# Altium PCB stm32c8t6.PcbDoc
Units mil, origin at the board's own origin, x right, y up, seen from the top; angles counter-clockwise.
Board outline 2539.23 x 2039 mil, 2 copper layers (Top Layer, Bottom Layer); 30 components, 48 nets, 151 pads, 26 vias.
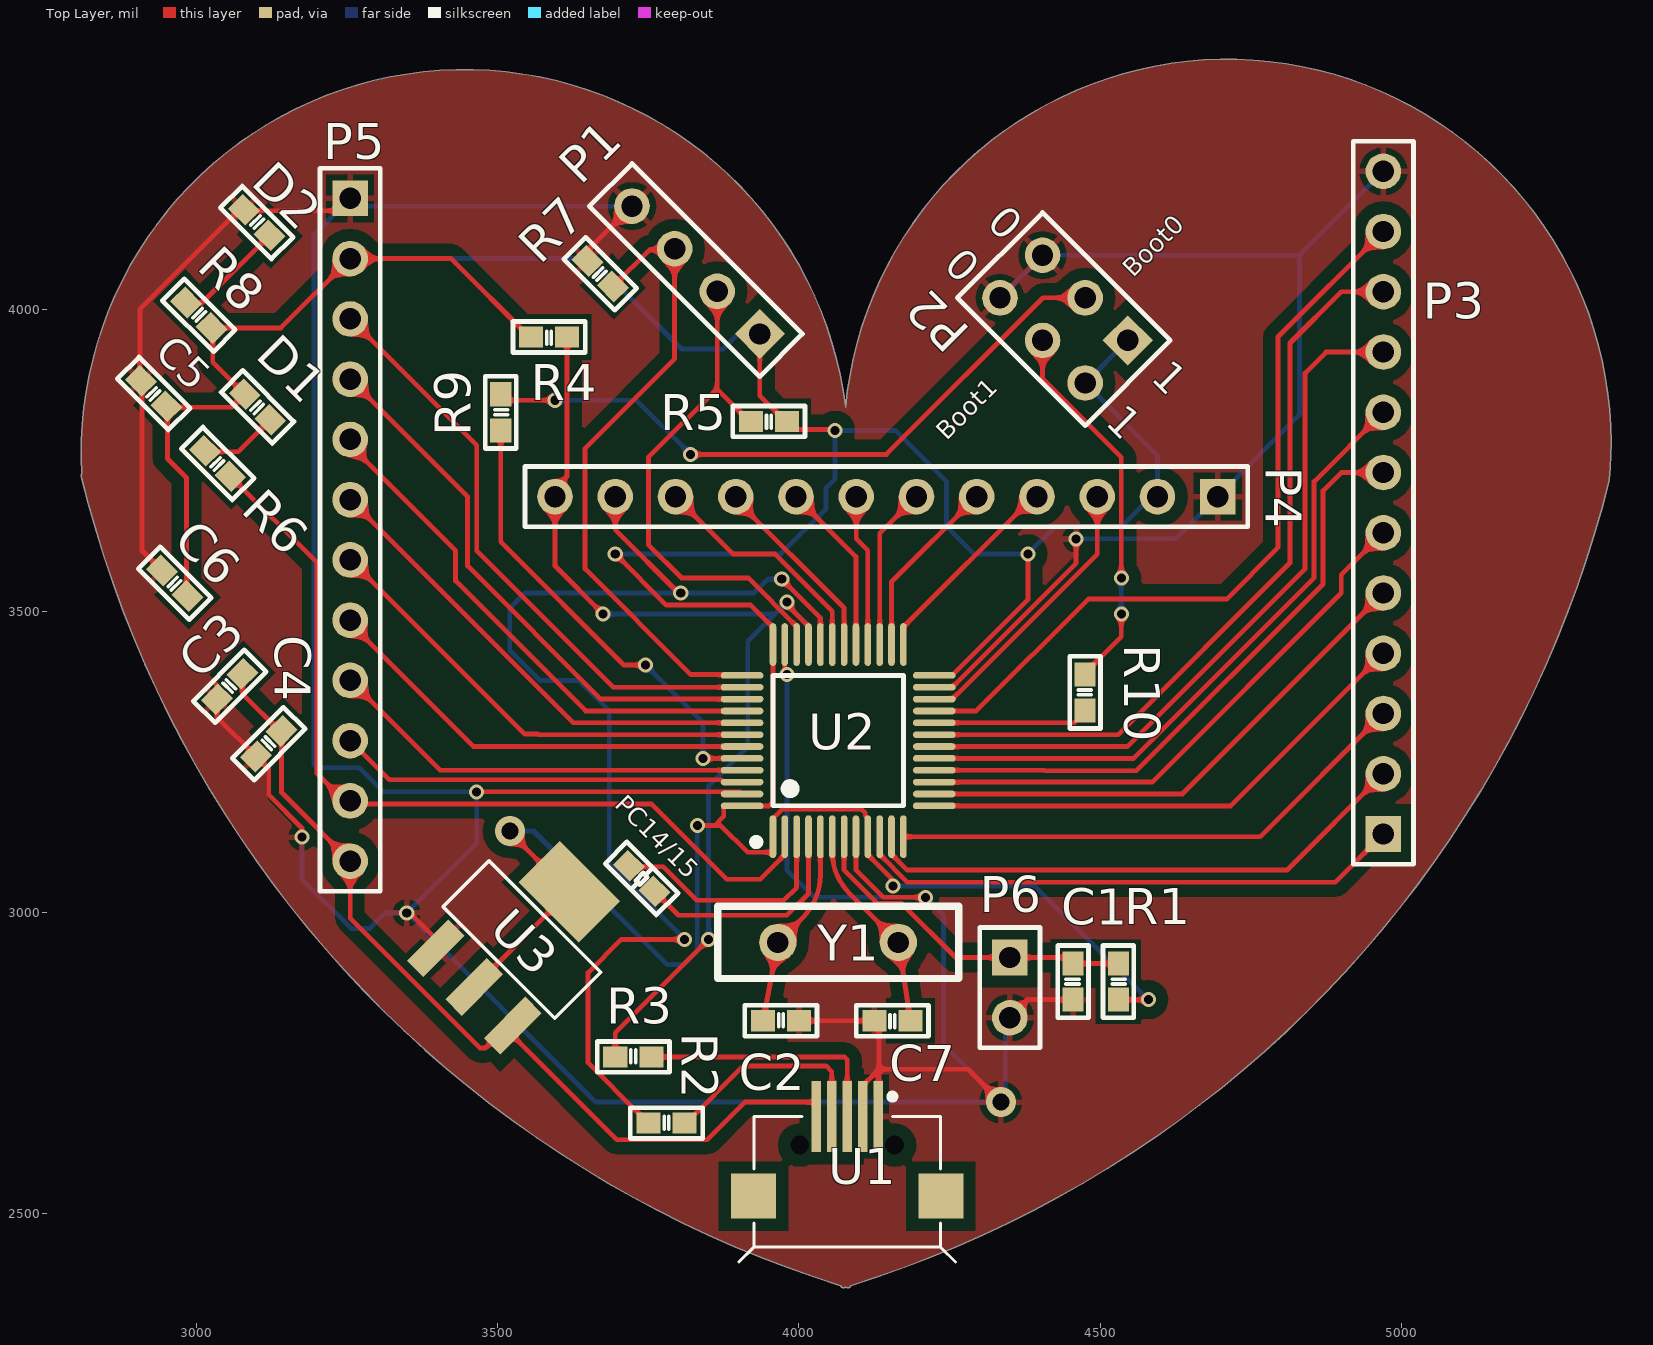
[diagram p0: Top Layer view]
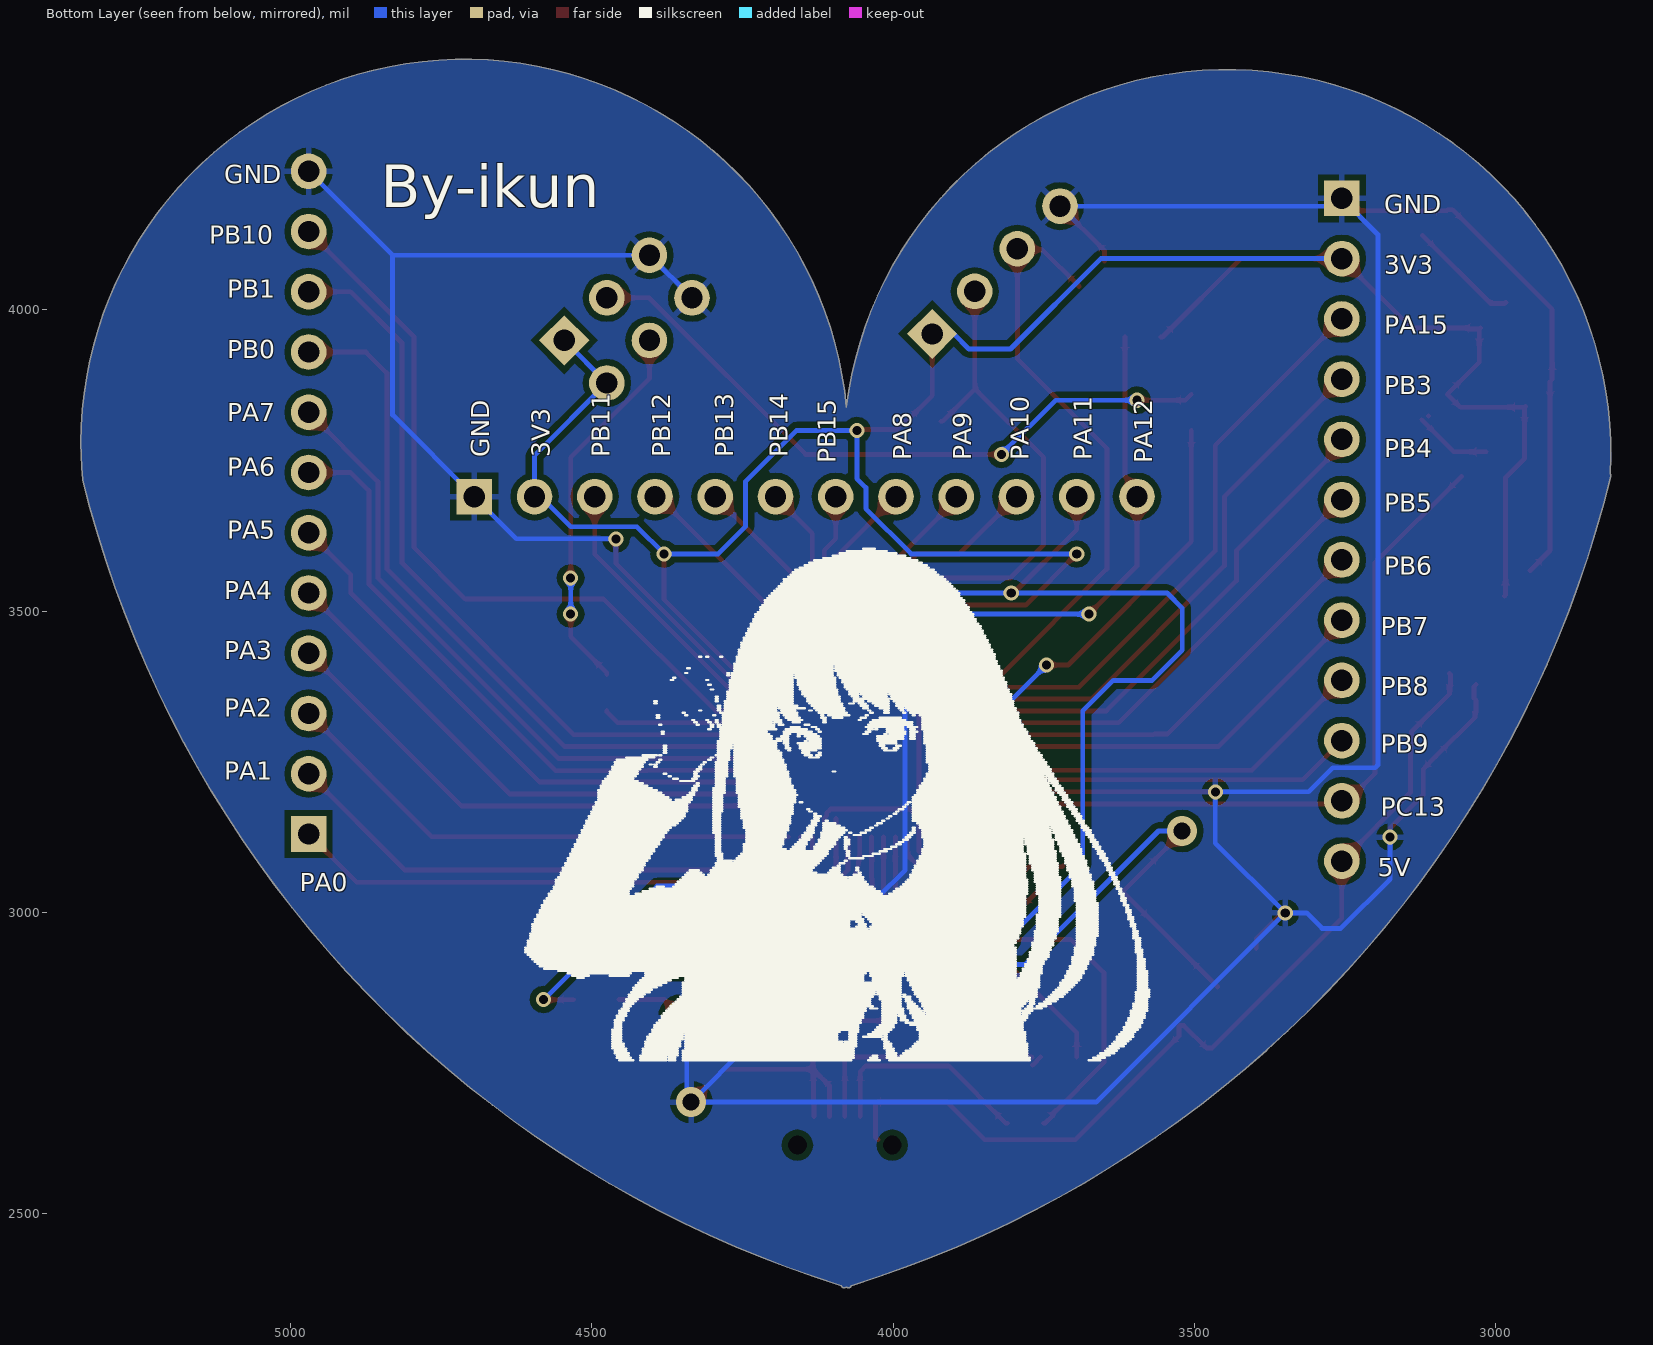
[diagram p1: Bottom Layer view, seen from below]

## Layer stack, top to bottom
Top Solder: solder mask 0.4, Solder Resist, Dk 3.5
Top Layer: signal copper 1.4
Dielectric 1: dielectric 12.6, FR-4, Dk 4.8
Bottom Layer: signal copper 1.4
Bottom Solder: solder mask 0.4, Solder Resist, Dk 3.5

## Board outline
4069.09,2380.34 ccw(c4073.86,2381.87) 4075.33,2377.07 ccw(c3528.81,4166) 4077.5,2377.74 ccw(c4626.19,4166) 4079.67,2377.07 ccw(c4081.14,2381.87) 4085.91,2380.34 ccw(c3528.81,4166) 5344.73,3717.24 ccw(c5339.87,3718.48) 5344.86,3717.99 ccw(c4711.2,3779.35) 5347.82,3779.35 ccw(c4711.2,3779.35) 4077.3,3838.09 ccw(c3445.22,3762.16) 2809.54,3727.65 ccw(c2813.6,3724.71) 2808.73,3723.53 ccw(c4626.19,4166)
cut-out: 0,0 10,0 10,10 0,10

## Design rules (kind name [scope] priority, off if disabled: settings)
Clearance Clearance_test [(InNamedPolygon('Top Layer-No Net1'))] p1: gap=10 ignorepadtopadclearanceinfootprint=TRUE
Clearance [InNamedPolygon('Top Layer-No Net')] p2: gap=20 ignorepadtopadclearanceinfootprint=FALSE
Clearance Clearance_U1_U2 [(InComponent('U1') AND InComponent('U2'))] p3: gap=0 ignorepadtopadclearanceinfootprint=TRUE
PolygonConnect [All] p1: connectstyle=Relief reliefconductorwidth=10 reliefentries=4 polygonreliefangle="90 Angle" airgapwidth=10
RoutingVias [All] p1: holewidth=15 width=25 viastyle="Through Hole" minholewidth=15 minwidth=20 maxholewidth=20 maxwidth=25
SolderMaskExpansion [All] p1: expansion=4 istentingtop=FALSE
Width [All] p1: maxlimit=30 minlimit=5 preferedwidth=8 minimp=50.000000 maximp=50.000000 favimp=50.000000
30 further rules are at their usual default settings.

## Components (designator, comment, footprint, x,y, rotation, side; value= is the part's Value field where it differs from the comment)
C1 "Cap" C0603 4455,2885 r270 top
C2 "Cap" C0603 3970.08,2820 r180 top
C3 "Cap" C0603 3055,3375 r225 top
C4 "Cap" C0603 3120,3280 r225 top
C5 "Cap" C0603 2928.84,3861.16 r315 top
C6 "Cap" C0603 2963.84,3546.16 r315 top
C7 "Cap" C0603 4155,2820 r0 top
D1 "LED0" C0603 3101.16,3838.84 r315 top
D2 "LED0" C0603 3100,4145 r135 top
P1 "Header 4" HDR1X4 3935,3960 r135 top
P2 "Header 3*2" HDR2X3 4545.71,3949.29 r135 top
P3 "Header 12" HDR1X12 4970,3130 r90 top
P4 "Header 12" HDR1X12 4695,3690 r180 top
P5 "Header 12" HDR1X12 3255,4185 r270 top
P6 "Header 2" HDR1X2 4350,2925 r270 top
PC14/15 "Res1" R0603 3738.84,3056.16 r315 top
R1 "Res1" C0603 4530,2884.92 r90 top
R2 "20R,0603" C0603 3780.08,2650 r180 top
R3 "20R,0603" C0603 3724.92,2760 r180 top
R4 "1.5k,0603" C0603 3585.08,3955 r0 top
R5 "Res1" C0603 3950,3815 r0 top
R6 "Res1" C0603 3035,3745 r315 top
R7 "Res1" C0603 3670,4060 r315 top
R8 "Res1" C0603 3003.84,3991.16 r135 top
R9 "Res1" C0603 3505,3830 r90 top
R10 "Res1" C0603 4475,3365.08 r270 top
U1 "USB-mrico" Micro_USB 4080,2595 r0 top
U2 "STM32F103C8T6" LC-LQFP-48_7x7x05P 4065,3285 r0 top
U3 "AMS1117-2.5" SOT-223-4_L6.5-W3.5-P2.30-LS7.0-BR 3540,2955 r225 top
Y1 "8M" XTAL1 3965,2950 r0 top

## Footprints (in the part's own frame and the unit in brackets; to place one, negate y for a bottom-side part, rotate by r counter-clockwise, add the part's x,y. Pads: shape width x height; smd on the part's side, far side on the other; paste and mask are expansions set on the pad)
C0603 [mil]
  rect 40x35 smd: 1(-29.92,0) 2(29.92,0)
  silkscreen extent -60,-26 60,26
HDR1X2 [mm] "Connector; Header; 2 Position"
  rect 1.5x1.5 hole 0.9: 1(0,0)
  round 1.5 hole 0.9: 2(2.54,0)
  silkscreen extent -1.27,-1.27 3.81,1.27
HDR1X4 [mm] "Connector; Header; 4 Position"
  rect 1.5x1.5 hole 0.9: 1(0,0)
  round 1.5 hole 0.9: 2(2.54,0) 3(5.08,0) 4(7.62,0)
  silkscreen extent -1.27,-1.27 8.89,1.27
HDR1X12 [mm] "Connector; Header; 12 Position"
  rect 1.5x1.5 hole 0.9: 1(0,0)
  round 1.5 hole 0.9: 2(2.54,0) 3(5.08,0) 4(7.62,0) 5(10.16,0) 6(12.7,0) 7(15.24,0) 8(17.78,0) 9(20.32,0) 10(22.86,0) 11(25.4,0) 12(27.94,0)
  silkscreen extent -1.27,-1.27 29.21,1.27
HDR2X3 [mm] "Connector; Header; 3x2 Position"
  rect 1.5x1.5 hole 0.9: 1(0,0)
  round 1.5 hole 0.9: 2(0,2.54) 3(2.54,0) 4(2.54,2.54) 5(5.08,0) 6(5.08,2.54)
  silkscreen extent -1.27,-1.27 6.35,3.81
LC-LQFP-48_7x7x05P [mm]
  oval 0.28x1.8 smd mask+0.051: 1(-2.75,-4.05) 2(-2.25,-4.05) 3(-1.75,-4.05) 4(-1.25,-4.05) 5(-0.75,-4.05) 6(-0.25,-4.05) 7(0.25,-4.05) 8(0.75,-4.05) 9(1.25,-4.05) 10(1.75,-4.05) 11(2.25,-4.05) 12(2.75,-4.05) 25(2.75,4.05) 26(2.25,4.05) 27(1.75,4.05) 28(1.25,4.05) 29(0.75,4.05) 30(0.25,4.05) 31(-0.25,4.05) 32(-0.75,4.05) 33(-1.25,4.05) 34(-1.75,4.05) 35(-2.25,4.05) 36(-2.75,4.05)
  oval 1.8x0.28 smd mask+0.051: 13(4.05,-2.75) 14(4.05,-2.25) 15(4.05,-1.75) 16(4.05,-1.25) 17(4.05,-0.75) 18(4.05,-0.25) 19(4.05,0.25) 20(4.05,0.75) 21(4.05,1.25) 22(4.05,1.75) 23(4.05,2.25) 24(4.05,2.75) 37(-4.05,2.75) 38(-4.05,2.25) 39(-4.05,1.75) 40(-4.05,1.25) 41(-4.05,0.75) 42(-4.05,0.25) 43(-4.05,-0.25) 44(-4.05,-0.75) 45(-4.05,-1.25) 46(-4.05,-1.75) 47(-4.05,-2.25) 48(-4.05,-2.75)
  silkscreen extent -3.6,-4.42 2.75,2.75
Micro_USB [mm]
  rect 0.4x3 smd: 1(1.3,1.679) 2(0.65,1.679) 3(0,1.679) 4(-0.65,1.679) 5(-1.3,1.679)
  round 0 hole 0.8 unplated: MH1(2,0.471) MH2(-2,0.471)
  rect 1.9x1.9 smd: ""(-3.95,-1.679) ""(3.95,-1.679)
  silkscreen extent -4.57,-4.46 4.57,2.64
R0603 [mil]
  rect 40x35 smd: 1(-29.92,0) 2(29.92,0)
  silkscreen extent -60,-26 60,26
SOT-223-4_L6.5-W3.5-P2.30-LS7.0-BR [mm]
  rect 2.47x0.98 smd mask+0.051: 1(2.835,-2.3) 2(2.835,0) 3(2.835,2.3)
  rect 2.47x3.6 smd mask+0.051: 4(-2.835,0)
  silkscreen extent -1.37,-3.33 1.37,3.33
XTAL1 [mil]
  round 62 hole 35.43: 1(0,0) 2(200,0)
  silkscreen extent -100,-60 300,60

## Part data
C1 C2 C3 C4 C5 C6 C7: "无极性电容"
D1 D2: "发光二极管"
P1 P2: "接插件"
P3 P4 P5: "Header, 12-Pin"
P6: "Header, 2-Pin"
PC14/15 R1 R5 R6 R7 R8 R9 R10: "贴片电阻"
R2 R3 R4: library part Res2, "Resistor"
U1: library part usb-STM
U2: "STM32单片机48引脚"
U3: "输出类型:固定;输出极性:正;输出通道数:1;最大输入电压:15V;输出电压:2.5V;压差:1.3V@(1A);输出电流:1A;电源纹波抑制比(PRSS):72dB@(120Hz);"
Y1: library part XTAL, "晶振"

## Via types
v1: diameter 25, hole 15, Top Layer to Bottom Layer, 24 vias
v2: diameter 50, hole 28, Top Layer to Bottom Layer, 2 vias

## Nets (pads, with @x,y where several pads share a name; then routed paths per layer and width w, separated by ;. In a path a pad name is that pad's centre, name@x,y a point inside that pad or via, vN(x,y) a via of type N, cw(c..) or ccw(c..) an arc to the next point about the centre after c; other vN are vias at no path point)
3V3: C5.2 C6.2 D1.1 P1.1 P2.1 P2.2 P4.2 P5.2 R1.1 R4.1 R5.2 R8.1 U2.1 U2.9 U2.24 U2.36 U2.48 U3.2 U3.4 | length 6873.4
  Top Layer w8: C5.2 C5.2@2951.77,3838.23 ; C6.2 2983.23,3526.77 2983.23,3721.77 2951.77,3753.23 C5.2@2951.77,3838.23 ; R8.1 R8.1@3026.77,3968.23 ; U3.2 U3.4 3520,3132.84 v2(3520,3135) ; R4.1 3552.66,3955 3422.66,4085 P5.2 3140,3970 3047.63,3970 3045.86,3968.23 R8.1@3026.77,3968.23 ; v1(3695,3595) 3780,3510 3920,3510 3955.05,3474.95 3955.34,3474.95 3956.73,3473.55 U2.36 3956.73,3182.99 3950.48,3176.73 U2.48 3876.58,3176.73 3875.18,3175.34 3875.18,3159.22 3860,3144.04 ; v1(3831.25,3144.04) 3860,3144.04 ; P1.1 3935,3857.42 3977.42,3815 R5.2 3993.42,3801.5 4058.5,3801.5 v1(4060,3800) ; v1(4155.72,3043.52) 4152.47,3046.77 4152.47,3057.38 4114.21,3095.63 U2.9 4114.21,3156.29 4110,3160.5 4110,3165 4103.7,3171.3 3972.56,3171.3 3956.73,3155.47 U2.1 3956.73,3101.03 3955.34,3099.63 3914.63,3099.63 3870.22,3144.04 3860,3144.04 ; U2.24@4194.53,3393.27 U2.24 4254.37,3393.27 4380,3518.9 v1(4380,3595) ; R1.1 v1(4580,2855) ; C5.2@2951.77,3838.23 3058.23,3838.23 D1.1 3026.77,3913.23 R8.1@3026.77,3968.23
  Bottom Layer w8: P5.2 3655,4085 3805,3935 3873.9,3935 3898.9,3960 P1.1 ; v2(3520,3135) 3559.34,3135 3780.68,2913.65 3808.65,2913.65 3831.25,2936.25 v1(3831.25,3144.04) v1@3828.61,3144.04 ; v1(3695,3595) 3970,3595 4045,3670 4045,3705 4060,3720 v1(4060,3800) 4160,3800 4245,3715 4245,3640 4290,3595 v1(4380,3595) 4425,3640 4535,3640 4585,3690 P4.2 4595,3758.58 P2.2 P2.1 ; v1(4155.72,3043.52) 4391.48,3043.52 v1(4580,2855)
5V: C3.1 C4.1 P5.12 U1.5 U3.3 | length 1536.1
  Top Layer w8: C3.1 3074.39,3394.39 3074.39,3375.3 3076.16,3373.53 3076.16,3362.62 3139.39,3299.39 3139.39,3280.3 3141.16,3278.53 3141.16,3198.84 P5.12 3255,2990 3470,2775 3480,2775 3517.05,2812.05 U3.3 3525.11,2794.89 3697.44,2622.56 3847.56,2622.56 3910,2685 4024.95,2685 4028.82,2681.13 U1.5 4028.82,2626.43 U1.5@4024.95,2622.56
BOOT0: R9.1 U2.44 | length 770.4
  Top Layer w8: R9.1 3505,3615 3709.53,3410.47 v1(3745.47,3410.47) ; v1@3840,3255 v1(3840.47,3255.47) U2.44
  Bottom Layer w8: v1(3745.47,3410.47) 3840.47,3315.47 v1(3840.47,3255.47)
BOOT1: R10.2 U2.20 | length 260.6
  Top Layer w8: U2.20 4456.87,3314.53 4475,3332.66 R10.2
CLK: P1.3 R7.2 U2.37 | length 1029.2
  Top Layer w8: R7.2 3752.05,4099.74 3791.89,4099.74 P1.3 3793.58,3918.58 3645,3770 3645,3570 3820.34,3394.66 3873.42,3394.66 3874.23,3393.85 3878.81,3393.85 U2.37@3879.63,3394.66
DIO: P1.2 R5.1 U2.34 | length 879.1
  Top Layer w8: P1.2 3864.29,3869.29 ; R5.1 3917.58,3815 3864.29,3868.29 3864.29,3869.29 ; U2.34 3996.1,3474.37 3915.47,3555 3805,3555 3750,3610 3750,3755 3864.29,3869.29
GND: C1.2 C2.1 C3.2 C4.2 C5.1 C6.1 C7.1 D2.2 P1.4 P2.5 P2.6 P3.12 P4.1 P5.1 P6.2 R7.1 U1.1 U1.2 U2.8 U2.23 U2.35 U2.47 U3.1 | length 9187.6
  Top Layer w8: C5.1@2905.92,3884.08 2905.92,4000.92 3071.16,4166.16 D2.2 3080.61,4164.39 3234.39,4164.39 P5.1 ; C5.1 2909.45,3880.55 2909.45,3600.55 C6.1 ; 3032.07,3378.24 3035.61,3374.7 3035.61,3355.61 C3.2 3032.07,3352.07 3032.07,3332.98 3033.84,3331.22 3033.84,3323.84 C4.2 3120,3237.69 3120,3195 3175,3140 v1(3175,3125) ; v1(3348.92,2998.92) 3348.92,3003.92 3397.05,2955.79 U3.1 ; v1(3465,3200) 3901.97,3200 U2.47 ; R7.1 3648.84,4098.11 P1.4 ; U2.35@3976.42,3473.58 U2.35 3976.42,3398.58 v1(3980,3395) ; C2.1 C7.1 4132.75,2812.32 4132.75,2739.45 ; U2.8@4094.53,3155.47 U2.8 4094.53,3070.47 4140.13,3024.87 v1(4210.24,3024.87) ; U1.2 4105.59,2712.28 4132.75,2739.45 ; U1.1 4132.75,2739.45 ; U2.23@4194.53,3373.58 U2.23 4254.37,3373.58 4460,3579.21 v1(4460,3620) ; v2(4335,2685) 4280.55,2739.45 4132.75,2739.45 ; P6.2 4380.08,2855.08 C1.2
  Bottom Layer w8: v1(3175,3125) 3175,3055 3256.69,2973.31 3287.7,2973.31 3313.31,2998.92 v1(3348.92,2998.92) ; P1.4 3267.87,4172.13 P5.1 3195,4125 3195,3244.69 3199.69,3240 3270,3240 3310,3200 v1(3465,3200) 3465,3115 v1(3348.92,2998.92) ; v1(3980,3395) 3980,3070 4025.13,3024.87 v1(4210.24,3024.87) 4240,2995.11 4240,2780 v2(4335,2685) ; P2.6 P2.5 4830.71,4090.71 ; P6.2 4342.5,2817.5 4342.5,2692.5 v2(4335,2685) ; v1(4460,3620) 4625,3620 P4.1 4830.71,3825.71 4830.71,4090.71 ; P3.12 4830.71,4090.71 ; v1(3348.92,2998.92) 3662.84,2685 v2(4335,2685)
NetD1_2: D1.2 R6.1 | length 128.8
  Top Layer w8: R6.1@3015.61,3764.39 3069.02,3764.39 D1.2
NetD2_1: D2.1 R8.2 | length 186.1
  Top Layer w8: R8.2 2984.45,4010.55 3007.86,4010.55 D2.1
NetP2_3: P2.3 R9.2 | length 1119.1
  Top Layer w8: R9.2 3514.92,3850 v1(3595,3850) ; v1(3820,3760) 4145,3760 4405,4020 P2.3
  Bottom Layer w8: v1(3595,3850) 3730,3850 v1(3820,3760)
NetP2_4: P2.4 R10.1 | length 633.3
  Top Layer w8: P2.4 4404.29,3885.71 4535,3755 v1(4535,3555) ; R10.1 4475,3397.5 4535,3457.5 v1(4535,3495)
  Bottom Layer w8: v1(4535,3495) v1(4535,3555)
NetPC14/15_1: PC14/15.1 U2.3 | length 395.3
  Top Layer w8: PC14/15.1 3719.45,3075.55 3774.45,3075.55 3830,3020 3975,3020 3996.1,3041.1 U2.3
NetPC14/15_2: PC14/15.2 U2.4 | length 381.9
  Top Layer w8: PC14/15.2 3800,2995 3980,2995 4015.79,3030.79 U2.4
NetR2_1: R2.1 U1.4 | length 362.1
  Top Layer w8: R2.1 3812.5,2650 3907.5,2745 4045,2745 4054.41,2735.59 U1.4
NetR3_1: R3.1 U1.3 | length 426.5
  Top Layer w8: R3.1 R3.1@3768.34,2746.5 ; R3.1@3768.97,2759.01 3769.96,2760 4075,2760 4080,2755 U1.3
NRST: C1.1 P6.1 R1.2 U2.7 | length 574.9
  Top Layer w8: U2.7 4074.84,3070.16 4130,3015 4170,3015 4260,2925 P6.1 4444.92,2925 C1.1 4529.92,2914.92 R1.2
OSCIN: C2.2 U2.5 Y1.1 | length 332.8
  Top Layer w8: C2.2 Y1.1 4006.18,2991.18 ccw(c3935.47,3061.89) 4035.47,3061.89 U2.5
OSCOUT: C7.2 U2.6 Y1.2 | length 348.3
  Top Layer w8: U2.6 4055.16,3101.26 ccw(c4155.16,3101.26) 4084.45,3030.55 Y1.2 C7.2
PA0: P3.1 U2.10 | length 917.8
  Top Layer w8: U2.10 4133.9,3096.1 4180,3050 4890,3050 P3.1
PA1: P3.2 U2.11 | length 922.8
  Top Layer w8: U2.11 4153.58,3096.42 4180,3070 4810,3070 P3.2
PA2: P3.3 U2.12 | length 881.4
  Top Layer w8: U2.12 4765.55,3125.55 P3.3
PA3: P3.4 U2.13 | length 850.5
  Top Layer w8: U2.13 4716.73,3176.73 P3.4
PA4: P3.5 U2.14 | length 883.7
  Top Layer w8: U2.14 4636.42,3196.42 P3.5
PA5: P3.6 U2.15 | length 934.6
  Top Layer w8: U2.15 4586.1,3216.1 4900,3530 4900,3560 P3.6
PA6: P3.7 U2.16 | length 1041.7
  Top Layer w8: U2.16 4407.2,3235.79 4407.99,3235 4560,3235 4870,3545 4870,3700 4900,3730 P3.7
PA7: P3.8 U2.17 | length 1077.3
  Top Layer w8: U2.17 4555.47,3255.47 4855,3555 4855,3715 P3.8
PA8: P4.8 U2.29 | length 286.8
  Top Layer w8: P4.8 4094.53,3590.47 U2.29
PA9: P4.9 U2.30 | length 320
  Top Layer w8: P4.9 3895,3685 4074.84,3505.16 U2.30
PA10: P4.10 U2.31 | length 394.3
  Top Layer w8: P4.10 3890,3595 3960,3595 4055.16,3499.84 U2.31
PA11: P4.11 R2.2 U2.32 | length 1997.8
  Top Layer w8: P4.11 3695,3635 3800,3530 v1(3803.75,3530) ; R2.2 3747.66,2650 3734.16,2663.5 3734.16,2666 3650,2750.16 3650,2900 3705,2955 v1(3810,2955) ; v1(3971.38,3553.01) 4035.47,3488.91 U2.32 U2.32@4035,3444.92
  Bottom Layer w8: v1(3810,2955) 3685,3080 3685,3334.21 3634.21,3385 3570,3385 3520,3435 3520,3505 3545,3530 v1(3803.75,3530) 3925,3530 3948.01,3553.01 v1(3971.38,3553.01)
PA12: P4.12 R3.2 R4.2 U2.33 | length 1744.8
  Top Layer w8: R4.2 3615,3723.82 3595,3703.82 P4.12 3595,3575 v1(3675,3495) ; R3.2 3695,2800 v1(3850,2955) ; v1(3980,3515) 3980,3510.98 4015.79,3475.19 U2.33
  Bottom Layer w8: v1(3675,3495) 3960,3495 ; v1(3850,2955) 3850,3210 3915,3275 3915,3450 3960,3495 ; v1(3980,3515) 3960,3495
PA15: P5.3 U2.38 | length 1006.3
  Top Layer w8: P5.3 3465,3775 3465,3600 3691.42,3373.58 U2.38
PB0: P3.9 U2.18 | length 1207.3
  Top Layer w8: U2.18 4224.61,3275 4545,3275 4840,3570 4840,3895 4875,3930 P3.9
PB1: P3.10 U2.19 | length 1263.9
  Top Layer w8: U2.19 4529.84,3294.84 4815,3580 4815,3945 4900,4030 P3.10
PB3: P5.4 U2.39 | length 937.9
  Top Layer w8: P5.4 3450,3690 3450,3575 3671.1,3353.9 U2.39
PB4: P5.5 U2.40 | length 872.4
  Top Layer w8: P5.5 3255,3775 3430,3600 3430,3550 3645.79,3334.21 U2.40
PB5: P5.6 U2.41 | length 804
  Top Layer w8: P5.6 3625.47,3314.53 U2.41
PB6: P5.7 U2.42 | length 770.7
  Top Layer w8: P5.7 3543.86,3296.14 3565.98,3296.14 3567.28,3294.84 U2.42
PB7: P5.8 U2.43 | length 747.5
  Top Layer w8: P5.8@3260,3480 P5.8 3255,3480 3459.84,3275.16 U2.43
PB8: P5.9 U2.45 | length 712.4
  Top Layer w8: P5.9 3404.21,3235.79 U2.45
PB9: P5.10 U2.46 | length 679.1
  Top Layer w8: P5.10 3320,3220 3870.91,3220 3874.81,3216.1 U2.46
PB10: P3.11 U2.21 | length 1280.2
  Top Layer w8: U2.21 4294.21,3334.21 4480,3520 4710,3520 4795,3605 4795,3955 P3.11
PB11: P4.3 U2.22 | length 465.7
  Top Layer w8: U2.22 4254.37,3353.9 4495,3594.53 P4.3
PB12: P4.4 U2.25 | length 340.5
  Top Layer w8: U2.25 4173.27,3473.55 4389.72,3690 P4.4
PB13: P4.5 U2.26 | length 304.1
  Top Layer w8: U2.26 4153.58,3548.58 P4.5
PB14: P4.6 U2.27 | length 280.9
  Top Layer w8: U2.27 4133.9,3628.9 P4.6 P4.6@4195,3680
PB15: P4.7 U2.28 | length 253.5
  Top Layer w8: P4.7 4095,3620 4114.21,3600.79 U2.28
PC13: P5.11 R6.2 U2.2 | length 1449.1
  Top Layer w8: R6.2 3200,3580 3200,3230 3245,3185 P5.11 3260,3180 3755,3180 3880,3055 3935.79,3055 3976.42,3095.63 U2.2
pads on no net: U1. U1.MH1 U1.MH2
copper on no net: | length 13.3
  Bottom Layer w8: 4475,3862.58 4479.69,3867.26 4486.31,3867.26

## Polygon pours and split planes (outlines as drawn)
GND on Bottom Layer "Top Layer-No Net1" (solid, remove dead copper, pour order 6): 4069.09,2380.34 ccw(c4073.86,2381.87) 4075.33,2377.07 ccw(c3528.81,4166) 4077.5,2377.74 ccw(c4626.19,4166) 4079.67,2377.07 ccw(c4081.14,2381.87) 4085.91,2380.34 ccw(c3528.81,4166) 5344.73,3717.24 ccw(c5339.87,3718.48) 5344.86,3717.99 ccw(c4711.2,3779.35) 5347.82,3779.35 ccw(c4711.2,3779.35) 4077.3,3838.09 ccw(c3445.22,3762.16) 2809.54,3727.65 ccw(c2813.6,3724.71) 2808.73,3723.53 ccw(c4626.19,4166)
GND on Top Layer "Top Layer-No Net" (solid, remove dead copper, pour order 1): 4069.09,2380.34 ccw(c4073.86,2381.87) 4075.33,2377.07 ccw(c3528.81,4166) 4077.5,2377.74 ccw(c4626.19,4166) 4079.67,2377.07 ccw(c4081.14,2381.87) 4085.91,2380.34 ccw(c3528.81,4166) 5344.73,3717.24 ccw(c5339.87,3718.48) 5344.86,3717.99 ccw(c4711.2,3779.35) 5347.82,3779.35 ccw(c4711.2,3779.35) 4077.3,3838.09 ccw(c3445.22,3762.16) 2809.54,3727.65 ccw(c2813.6,3724.71) 2808.73,3723.53 ccw(c4626.19,4166)

## Silkscreen, mask and mechanical layers (free items; w line width, h text height)
Top Overlay:
  text "Boot0" at 4555,4052.07 h30 r45
  text "Boot1" at 4245,3782.07 h30 r45
Bottom Overlay:
  drawing of 1122 lines, arcs and shapes, not listed
  text "GND" at 5110,4210 h30
  text "By-ikun" at 4850,4170 h70
  text "GND" at 3185,4160 h30
  text "PB10" at 5135,4110 h30
  text "3V3" at 3185,4060 h30
  text "PB1" at 5105,4020 h30
  text "PA15" at 3185,3960 h30
  text "PB0" at 5105,3920 h30
  text "PB3" at 3185,3860 h30
  text "PA7" at 5105,3815 h30
  text "PB4" at 3185,3755 h30
  text "PB14" at 4175,3755 h30 r270
  text "PB13" at 4265,3755 h30 r270
  text "PB12" at 4370,3755 h30 r270
  text "PB11" at 4470,3755 h30 r270
  text "3V3" at 4570,3755 h30 r270
  text "GND" at 4670,3755 h30 r270
  text "PA11" at 3670,3750 h30 r270
  text "PA10" at 3775,3750 h30 r270
  text "PA9" at 3870,3750 h30 r270
  text "PA8" at 3970,3750 h30 r270
  text "PA12" at 3570,3745 h30 r270
  text "PB15" at 4095,3745 h30 r270
  text "PA6" at 5105,3725 h30
  text "PB5" at 3185,3665 h30
  text "PA5" at 5105,3620 h30
  text "PB6" at 3185,3560 h30
  text "PA4" at 5110,3520 h30
  text "PB7" at 3190,3460 h30
  text "PA3" at 5110,3420 h30
  text "PB8" at 3190,3360 h30
  text "PA2" at 5110,3325 h30
  text "PB9" at 3190,3265 h30
  text "PA1" at 5110,3220 h30
  text "PC13" at 3190,3160 h30
  text "5V" at 3195,3060 h30
  text "PA0" at 4985,3035 h30
Mechanical 1:
  lines w10: 2813.6,3724.71 ccw(c4626.19,4166) 4081.14,2381.87 ; 2814.71,3724.98 cw(c3445.22,3762.16) 4073.12,3830.47 ; 4073.86,2381.87 ccw(c3528.81,4166) 5339.87,3718.48 ccw(c4711.2,3779.35) 4081.66,3830.39 ; 4073.12,3830.47 4080.59,3830.47 ; 4073.12,3830.47 4080.59,3830.47 ; 4073.12,3830.47 4080.59,3830.47

## Text inside footprints (layer, text, board x,y; h text height)
P2: Top Overlay "0" at 4305.29,4076.57 h50 r135; Top Overlay "0" at 4376,4147.28 h50 r135; Top Overlay "1" at 4506.82,3811.4 h50 r315; Top Overlay "1" at 4582.49,3885.45 h50 r315